# Altium PCB Plata_3.PcbDoc
Units mm, origin at the board's own origin, x right, y up, seen from the top; angles counter-clockwise.
Board outline 44 x 28 mm, 2 copper layers (Top Layer, Bottom Layer), stack 1.569 mm thick; 9 components, 4 nets, 20 pads, 6 vias.
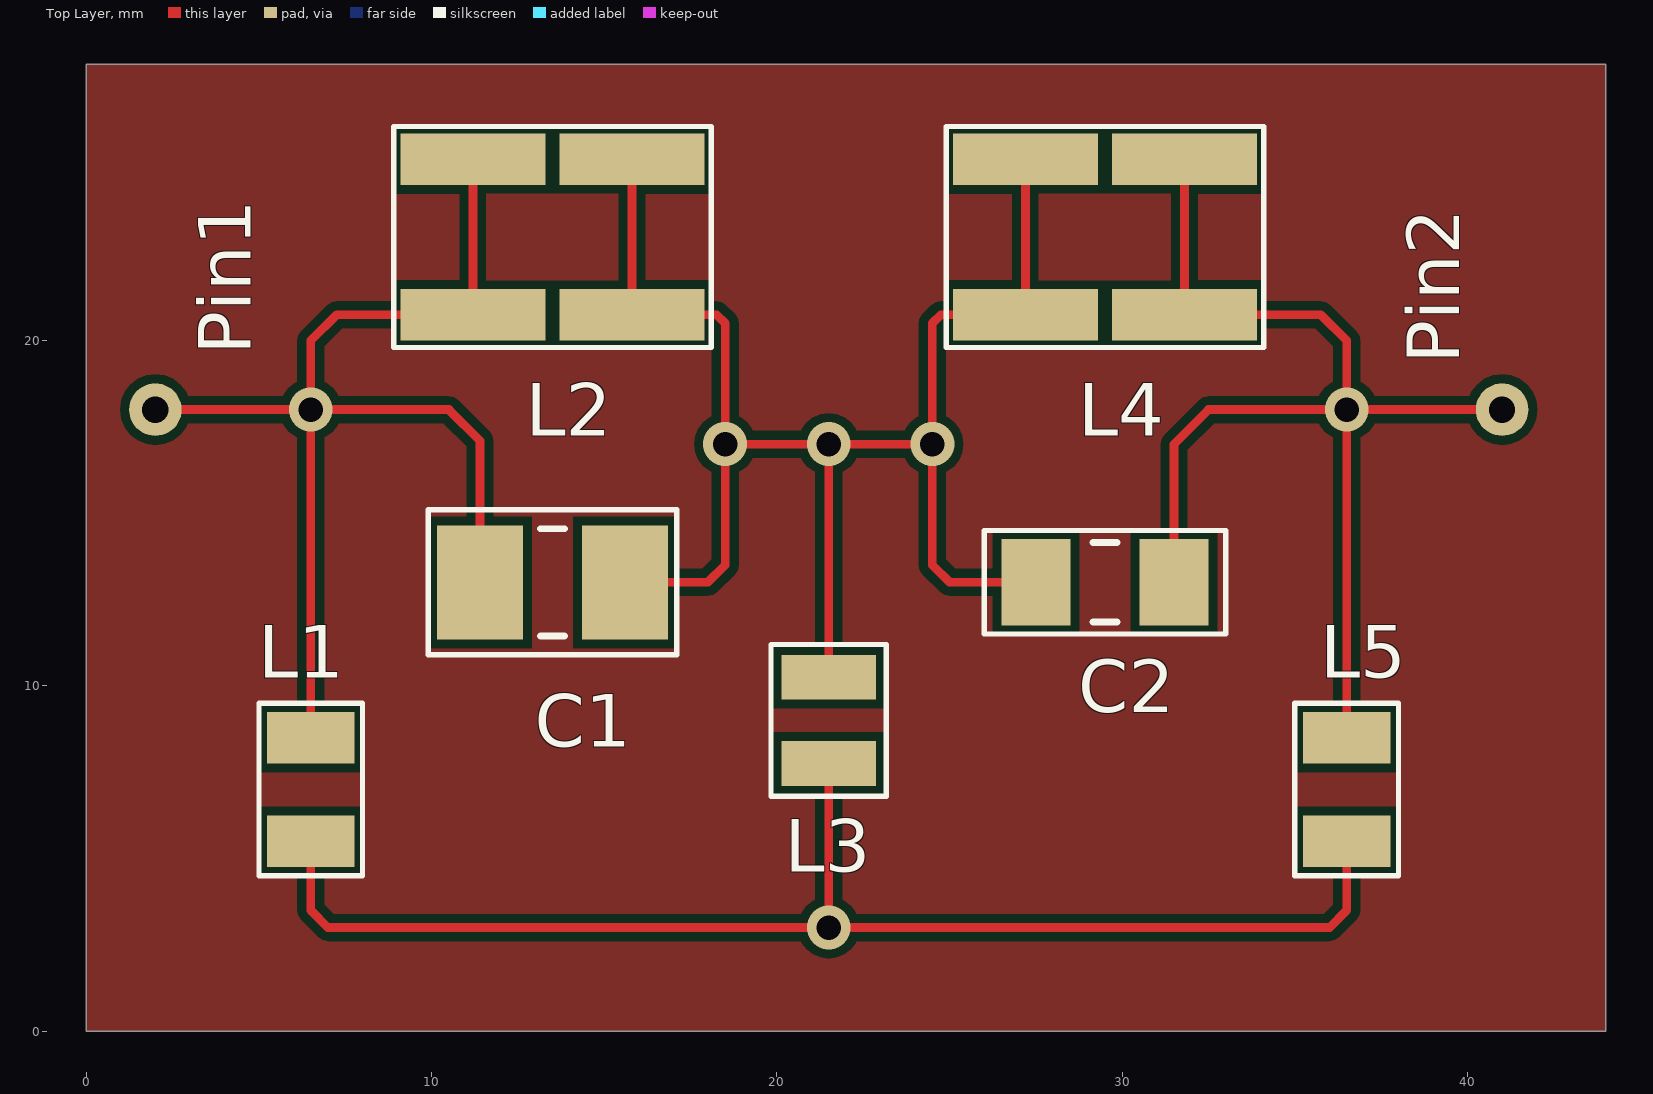
[diagram p0: Top Layer view]
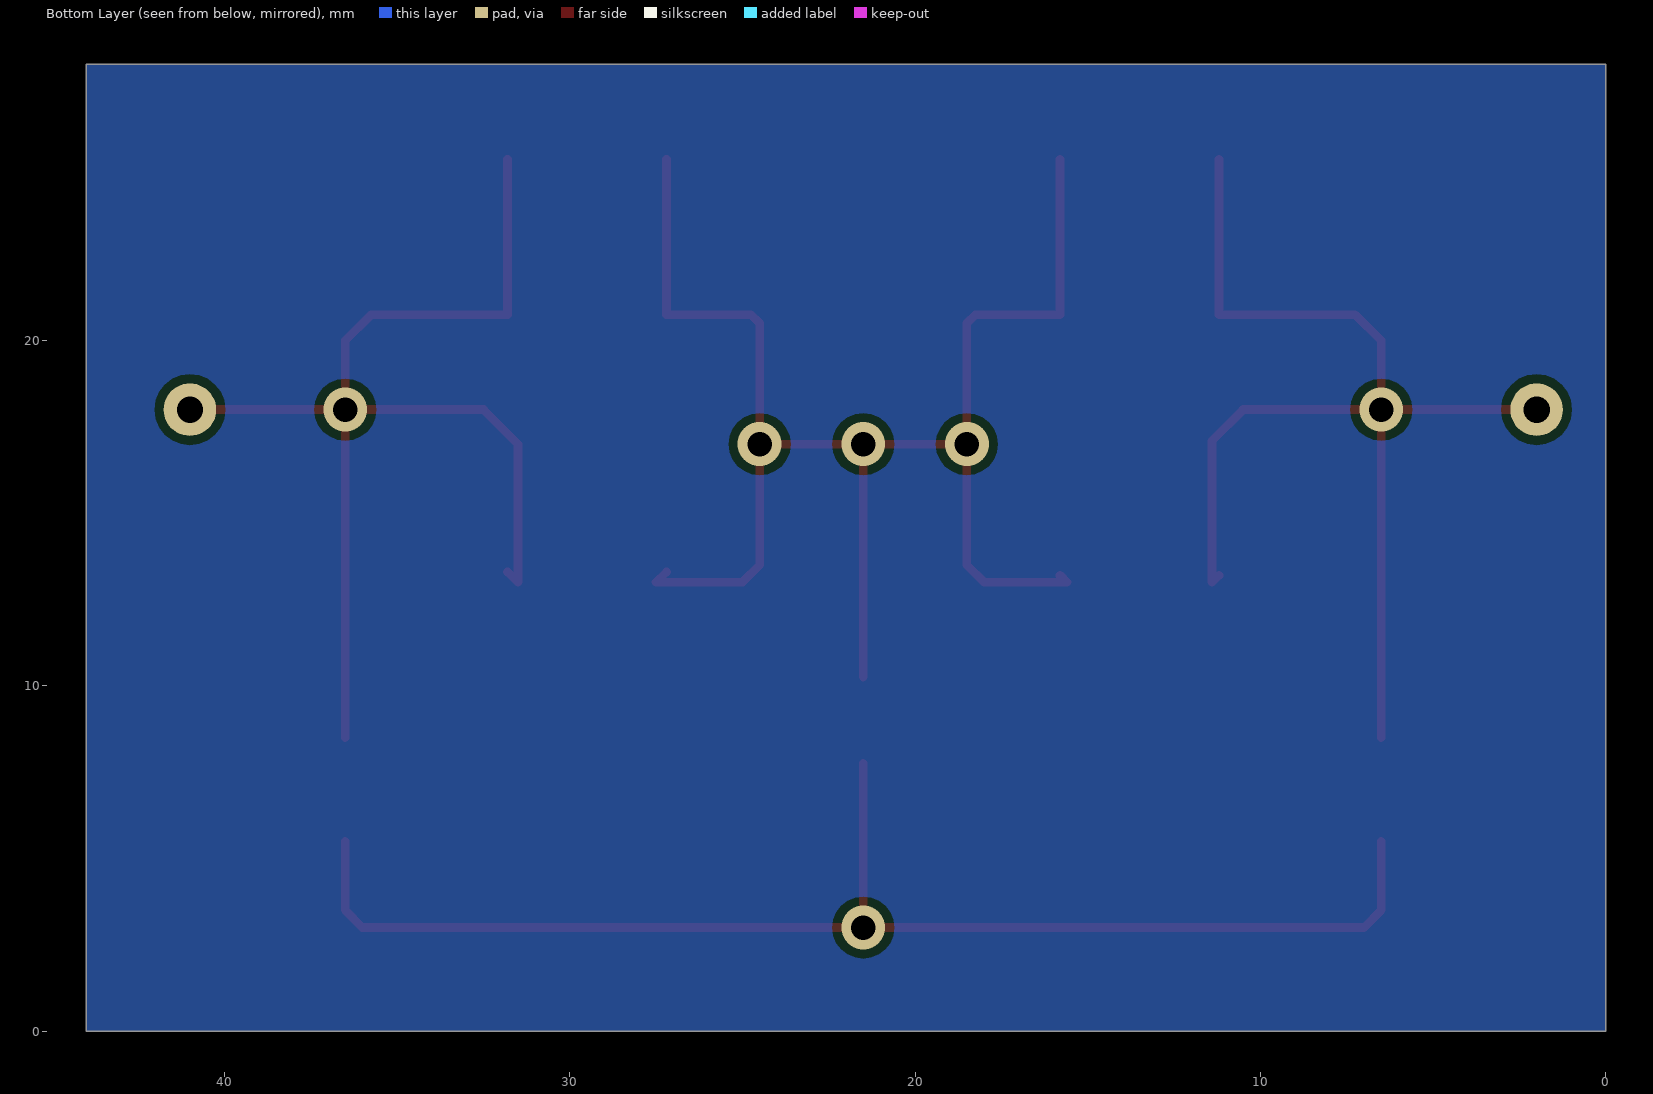
[diagram p1: Bottom Layer view, seen from below]

## Layer stack, top to bottom
Top Solder: solder mask 0.0254, SM-001, Dk 4
Top Layer: signal copper 0.035
Dielectric 1: core 1.4986, Core-043, Dk 4.3
Bottom Layer: signal copper 0.035
Bottom Solder: solder mask 0.0254, SM-001, Dk 4

## Board outline
0,0 44,0 44,28 0,28

## Design rules (kind name [scope] priority, off if disabled: settings)
Clearance [All] p1: gap=0.254 ignorepadtopadclearanceinfootprint=FALSE except(0: Arc-Hole Track-Hole SMDPad-Hole THPad-Hole Via-Hole Fill-Hole Poly-Hole Region-Hole Text-Hole)
PolygonConnect [All] p1: connectstyle=Relief reliefconductorwidth=0.254 reliefentries=4 polygonreliefangle="90 Angle" airgapwidth=0.254
RoomDefinition Sheet3 [InComponentClass('Sheet3')] p1: confinementstyle=ConfineIn formatcopy=TRUE lockcomponents=FALSE outline -3,-3 47,-3 47,31 -3,31
RoutingVias [All] p1: holewidth=0.711 width=1.27 viastyle="Through Hole" minholewidth=0.711 minwidth=1.27 maxholewidth=0.711 maxwidth=1.27
SolderMaskExpansion [All] p1: expansion=0.102 istentingtop=FALSE
Width [All] p1: maxlimit=0.254 minlimit=0.254 preferedwidth=0.254
30 further rules are at their usual default settings.

## Classes and differential pairs
component class Sheet3: C1 C2 L1 L3 L4 L5 Pin1 Pin2

## Components (designator, comment, footprint, x,y, rotation, side; value= is the part's Value field where it differs from the comment)
C1 "C1" C1 13.5,13 r0 top
C2 "C2" C2 29.5,13 r0 top
L1 "L1,L5" L1,L5 6.5,7 r90 top
L2 "L2,L4" L2,L4 13.5,23 r270 top
L3 "L3" L3 21.5,9 r270 top
L4 "L2,L4" L2,L4 29.5,23 r270 top
L5 "L1,L5" L1,L5 36.5,7 r90 top
Pin1 "Pin" Pin 2,18 r90 top
Pin2 "Pin" Pin 41,18 r90 top

## Footprints (in the part's own frame and the unit in brackets; to place one, negate y for a bottom-side part, rotate by r counter-clockwise, add the part's x,y. Pads: shape width x height; smd on the part's side, far side on the other; paste and mask are expansions set on the pad)
C1 [mm] "Chip Capacitor, 2-Leads, Body 3,20x2,50mm, IPC Medium Density"
  rect 2.5x3.3 smd: 1(-2.1,0) 2(2.1,0)
  silkscreen extent -3.6,-2.1 3.6,2.1, body extent -1.7,-1.35 1.7,1.35, height 1.5
C2 [mm] "Chip Capacitor, 2-Leads, Body 3,20x1,60mm, IPC Medium Density"
  rect 2x2.5 smd: 1(-2,0) 2(2,0)
  silkscreen extent -3.5,-1.5 3.5,1.5, body extent -1.7,-0.9 1.7,0.9, height 1.5
L1,L5 [mm]
  rect 1.5x2.54 smd: 1(-1.5,0) 2(1.5,0)
  silkscreen extent -2.5,-1.5 2.5,1.5
L2,L4 [mm]
  rect 1.5x4.2 smd: 1(-2.25,-2.3) 2(-2.25,2.3) 3(2.25,-2.3) 4(2.25,2.3)
  silkscreen extent -3.2,-4.6 3.2,4.6
L3 [mm]
  rect 1.3x2.74 smd: 1(1.25,0) 2(-1.25,0)
  silkscreen extent -2.2,-1.67 2.2,1.67
Pin [mil]
  round 60 hole 30: 1(0,0)

## Via types
v1: diameter 1.27, hole 0.711, Top Layer to Bottom Layer, 6 vias

## Nets (pads, with @x,y where several pads share a name; then routed paths per layer and width w, separated by ;. In a path a pad name is that pad's centre, name@x,y a point inside that pad or via, vN(x,y) a via of type N, cw(c..) or ccw(c..) an arc to the next point about the centre after c; other vN are vias at no path point)
GND: L1.1 L3.1 L5.1 | length 39.2
  Top Layer w0.254: L1.1 6.5,3.5 7,3 v1(21.5,3) ; L3.1 v1(21.5,3) ; L5.1 36.5,3.5 36,3 v1(21.5,3)
NetC1_1: C1.1 L1.2 L2.1 L2.3 Pin1.1 | length 35.2
  Top Layer w0.254: Pin1.1 v1(6.5,18) ; L1.2 v1(6.5,18) ; C1.1@11.2,13.2 C1.1 11.4,17.1 10.5,18 v1(6.5,18) ; L2.1 L2.3 7.25,20.75 6.5,20 v1(6.5,18)
NetC1_2: C1.2 C2.1 L2.2 L2.4 L3.2 L4.1 L4.3 | length 48.4
  Top Layer w0.254: C1.2@15.8,13.2 C1.2 18,13 18.5,13.5 v1(18.5,17) ; L2.2 L2.4 18.25,20.75 18.5,20.5 v1(18.5,17) ; L3.2 v1(21.5,17) ; C2.1@27.2,13.3 C2.1 25,13 24.5,13.5 v1(24.5,17) ; L4.1 L4.3 24.75,20.75 24.5,20.5 v1(24.5,17) ; v1(18.5,17) v1(21.5,17) ; v1(21.5,17) v1(24.5,17)
NetC2_2: C2.2 L4.2 L4.4 L5.2 Pin2.1 | length 35.3
  Top Layer w0.254: C2.2@31.8,13.3 C2.2 31.5,17 32.5,18 v1(36.5,18) ; L4.2 L4.4 35.75,20.75 36.5,20 v1(36.5,18) ; L5.2 v1(36.5,18) ; Pin2.1 v1(36.5,18)

## Polygon pours and split planes (outlines as drawn)
no net on Top Layer "NONET_L01_P000" (solid, pour order 0): 0,28 44,28 44,0 0,0
no net on Bottom Layer "NONET_L02_P001" (solid, pour order 1): 0,28 44,28 44,0 0,0